# Altium PCB MCU_for_fabrication.PcbDoc
Units mm, origin at the board's own origin, x right, y up, seen from the top; angles counter-clockwise.
Board outline 54.25 x 54.25 mm, 2 copper layers (Top Layer, Bottom Layer); 72 components, 0 nets, 237 pads, 75 vias.
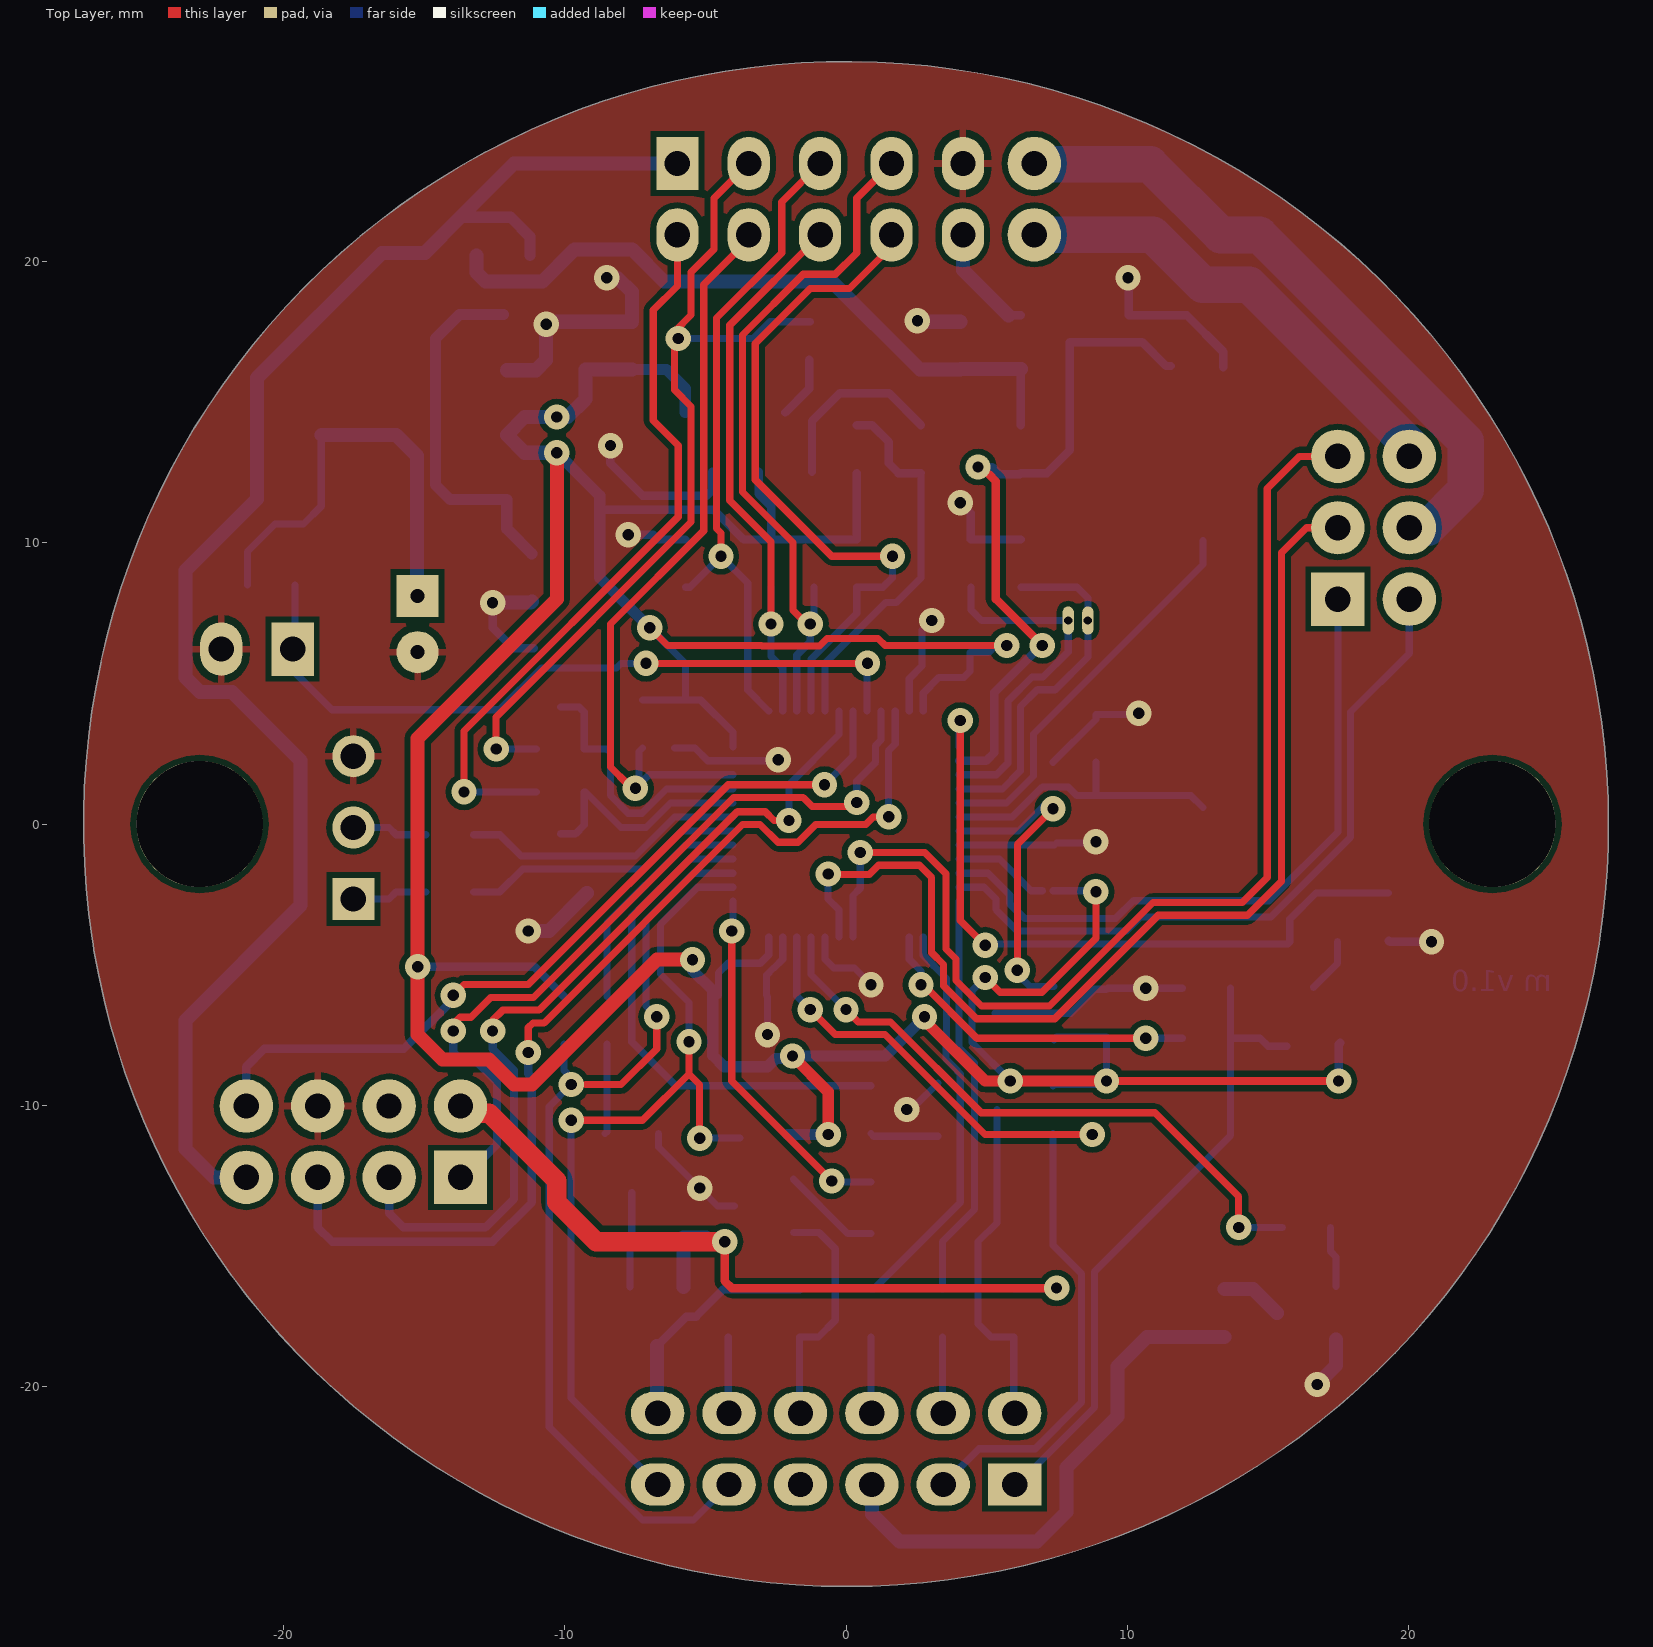
[diagram p0: Top Layer view]
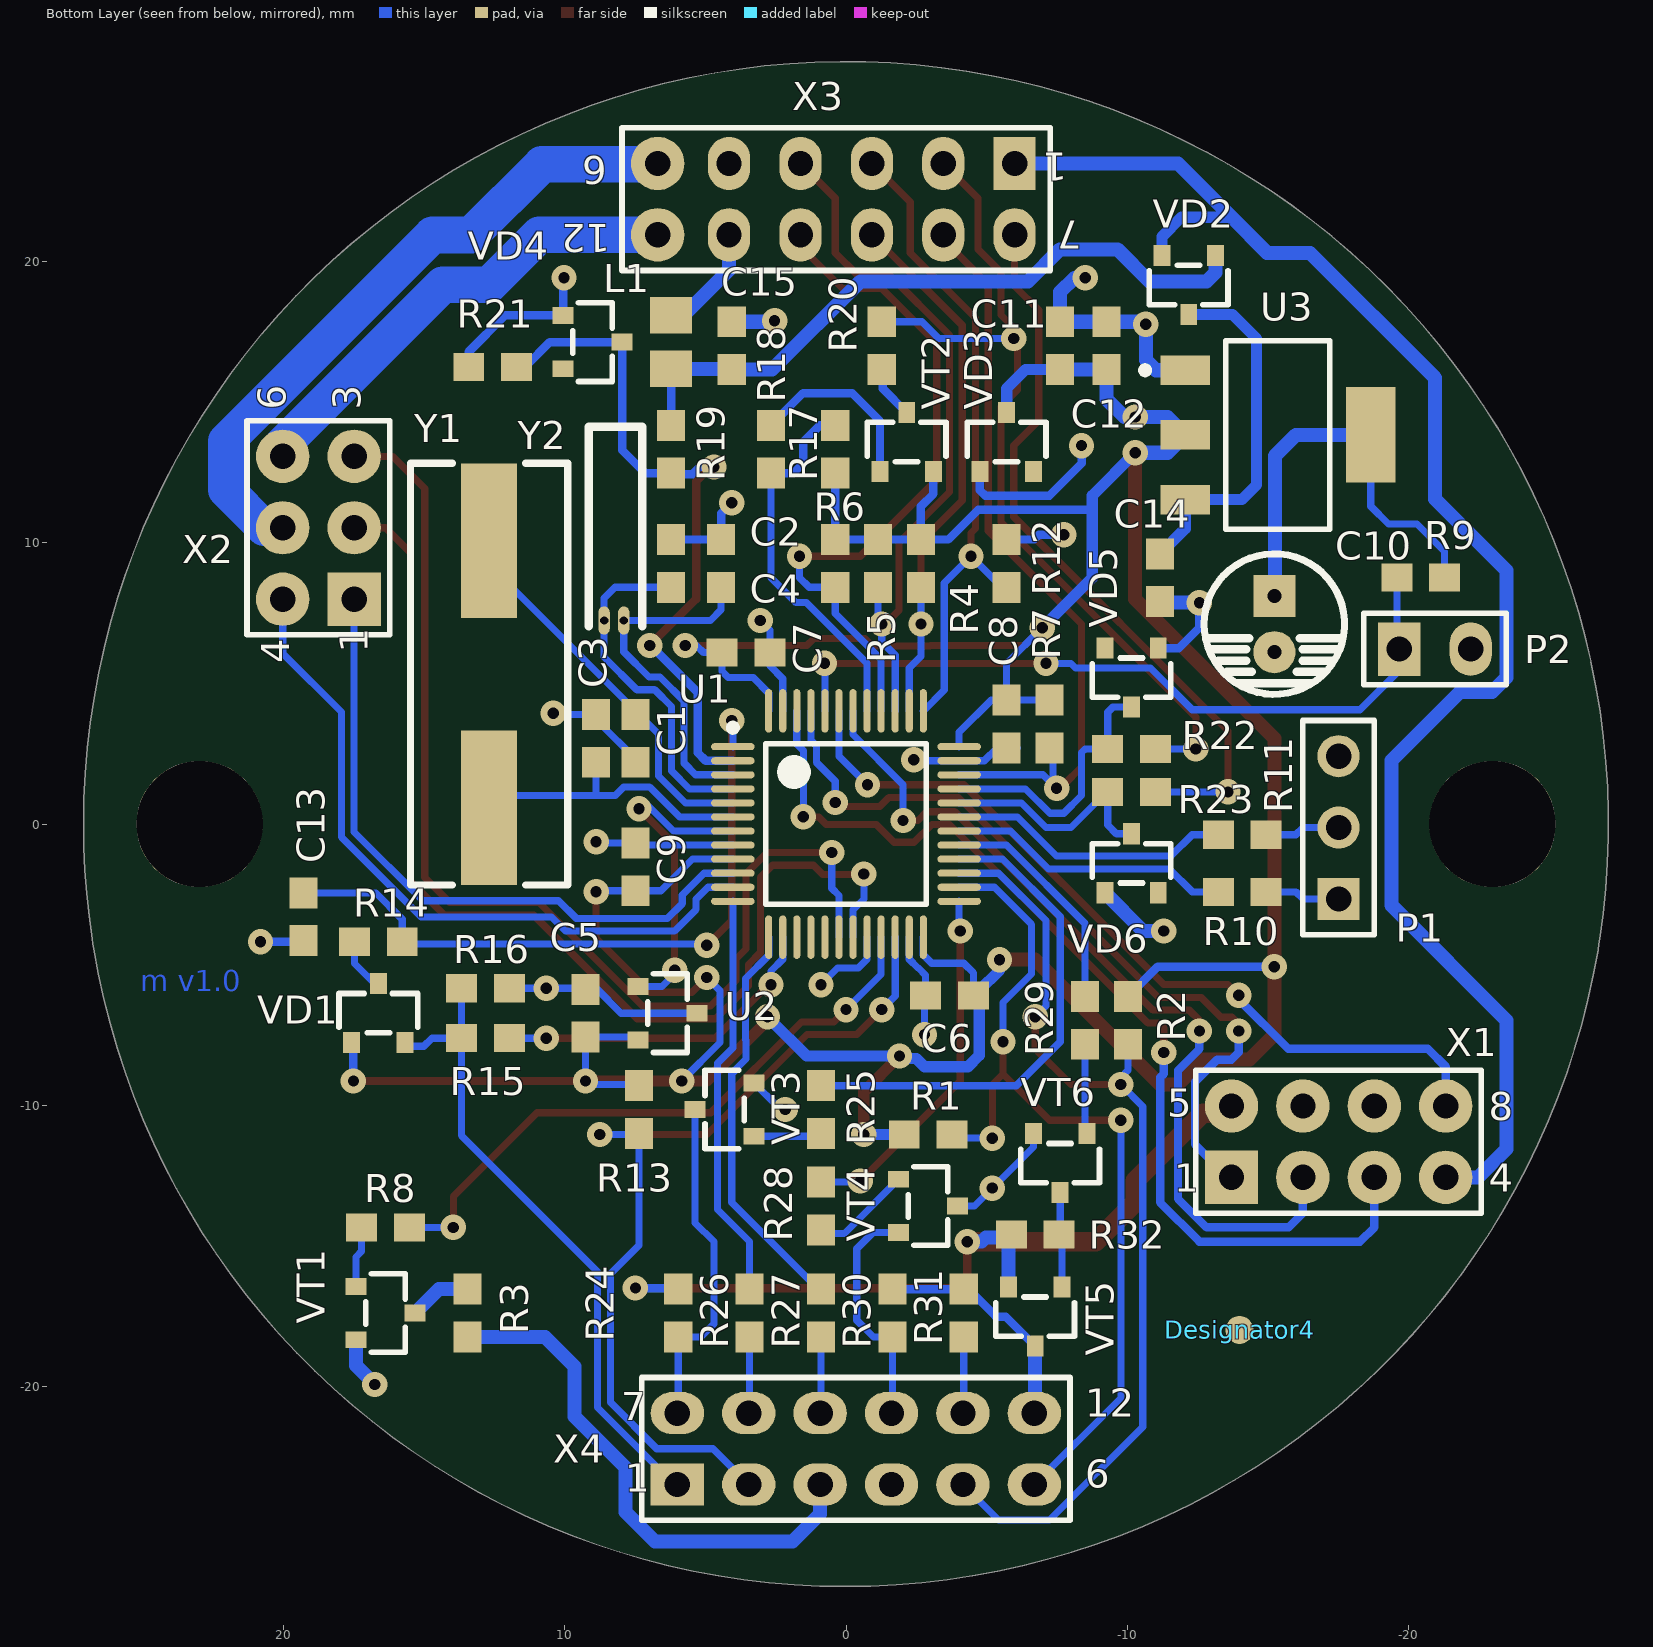
[diagram p1: Bottom Layer view, seen from below]

## Layer stack, top to bottom
Top Solder: solder mask 0.0102, Solder Resist, Dk 3.5
Top Layer: signal copper 0.0356
Dielectric 1: dielectric 0.32, FR-4, Dk 4.8
Bottom Layer: signal copper 0.0356
Bottom Solder: solder mask 0.0102, Solder Resist, Dk 3.5

## Board outline
-26.755,-4.48 cw(c0,0) -26.818,-4.086 cw(c0,0) 27.127,0 cw(c0,0) 26.818,-4.086 cw(c0,0) 26.762,-4.439 cw(c0,0)

## Design rules (kind name [scope] priority, off if disabled: settings)
Clearance [All] p1: gap=0.254
PolygonConnect [All] p1: connectstyle=Relief reliefconductorwidth=0.254 reliefentries=4 polygonreliefangle="90 Angle" airgapwidth=0.254
RoutingVias [All] p1: holewidth=0.711 width=1.27 viastyle="Through Hole" minholewidth=0.711 minwidth=1.27 maxholewidth=0.711 maxwidth=1.27
SolderMaskExpansion [All] p1: expansion=0.102
Width [All] p1: maxlimit=0.254 minlimit=0.254 preferedwidth=0.254
29 further rules are at their usual default settings.

## Components (designator, comment, footprint, x,y, rotation, side; value= is the part's Value field where it differs from the comment)
C1 "15p" 0603C 7.493,3.048 r90 bottom
C2 "15p" 0603C 4.445,9.271 r270 bottom
C3 "15p" 0603C 8.89,3.048 r270 bottom
C4 "15p" 0603C 6.223,9.271 r270 bottom
C5 "100n" 0603C 9.271,-6.731 r270 bottom
C6 "100n" 0603C -3.683,-6.096 r180 bottom
C7 "100n" 0603C 3.556,6.096 r0 bottom
C8 "100n" 0603C -5.715,3.556 r90 bottom
C9 "100n" 0603C 7.493,-1.524 r270 bottom
C10 "Cap Pol1" "CAP 5X...Х2" -15.24,7.112 r270 bottom
C11 "Cap" 0603C -7.62,17.018 r270 bottom
C12 "Cap" 0603C -9.271,17.018 r270 bottom
C13 "0.1u" 0603C 19.304,-3.302 r270 bottom
C14 "Cap" 0603C -11.176,8.763 r90 bottom
C15 "1000p" 0603C 4.064,17.018 r270 bottom
Designator4 "Comment" MRK_ROUND -14.351,-18.288 r90 bottom
L1 "BLM21PG600SN1D" 0805 6.223,17.145 r90 bottom
P1 "BOOT_UART" HDR1X3 -17.526,-2.667 r90 bottom
P2 "BOOT JUMPER" HDR1X2 -19.685,6.223 r180 bottom
R1 "10K" 0603R -2.921,-11.049 r0 bottom
R2 "10K" 0603R -10.033,-6.985 r90 bottom
R3 "470" 0603R 13.462,-17.399 r270 bottom
R4 "10K" 0603R -2.667,9.271 r90 bottom
R5 "10K" 0603R -1.143,9.271 r90 bottom
R6 "10K" 0603R 0.381,9.271 r90 bottom
R7 "10K" 0603R -7.239,3.556 r90 bottom
R8 "100" 0603R 16.383,-14.351 r180 bottom
R9 "1K" 0603R -20.447,8.763 r180 bottom
R10 "270" 0603R -14.097,-2.413 r0 bottom
R11 "270" 0603R -14.097,-0.381 r0 bottom
R12 "10K" 0603R -5.715,9.271 r270 bottom
R13 "10K" 0603R 7.366,-10.16 r270 bottom
R14 "1K" 0603R 16.637,-4.191 r180 bottom
R15 "10K" 0603R 12.827,-7.62 r0 bottom
R16 "100K" 0603R 12.827,-5.842 r0 bottom
R17 "10K" 0603R 0.381,13.335 r270 bottom
R18 "3K" 0603R 2.667,13.335 r90 bottom
R19 "10K" 0603R 6.223,13.335 r90 bottom
R20 "1.5K" 0603R -1.27,17.018 r270 bottom
R21 "100K" 0603R 12.573,16.256 r180 bottom
R22 "33" 0603R -10.16,2.667 r0 bottom
R23 "33" 0603R -10.16,1.143 r0 bottom
R24 "1K" 0603R 5.969,-17.399 r90 bottom
R25 "100" 0603R 0.889,-10.16 r90 bottom
R26 "100" 0603R 3.429,-17.399 r90 bottom
R27 "100" 0603R 0.889,-17.399 r90 bottom
R28 "100" 0603R 0.889,-13.589 r90 bottom
R29 "100" 0603R -8.509,-6.985 r90 bottom
R30 "1K" 0603R -1.651,-17.399 r270 bottom
R31 "10K" 0603R -4.191,-17.399 r270 bottom
R32 "1M" 0603R -6.731,-14.605 r180 bottom
U1 "STM32F103C8T6" LQFP48_L 0,0 r180 bottom
U2 "MCP100" SOT95P230X110-3L 6.35,-6.731 r180 bottom
U3 "LD1117AS12TR" SOT223 -15.367,13.843 r270 bottom
VD1 "BAT54C" SOT95P230X110-3L 16.637,-6.731 r90 bottom
VD2 "BAT54C" SOT95P230X110-3L -12.192,19.177 r270 bottom
VD3 "3.3V" SOT23_1DIODE -5.715,13.589 r90 bottom
VD4 "3.6V" SOT23_1DIODE 9.017,17.145 r180 bottom
VD5 "3.6V" SOT23_1DIODE -10.16,5.207 r270 bottom
VD6 "3.6V" SOT23_1DIODE -10.16,-1.397 r90 bottom
VT1 "BC847" SOT95P230X110-3L 16.383,-17.399 r180 bottom
VT2 "BC807" SOT95P230X110-3L -2.159,13.589 r90 bottom
VT3 "BC847" SOT95P230X110-3L 4.318,-10.16 r0 bottom
VT4 "BC807" SOT95P230X110-3L -2.921,-13.589 r180 bottom
VT5 "MOSFET_P" SOT95P230X110-3L -6.731,-17.526 r270 bottom
VT6 "BC847" SOT95P230X110-3L -7.62,-12.065 r270 bottom
X1 "CON8" HDR2X4_CEN -13.716,-12.573 r180 bottom
X2 "CON6" HDR2X3_CEN 17.5,8 r90 bottom (schematic designator X4)
X3 "CON12" HDR2X6_CEN#1 -6,23.5 r0 bottom
X4 "CON12" HDR2X6_CEN#2 6,-23.5 r180 bottom
Y1 "8 MHz" HC49(CRYSTAL) 12.7,5.334 r270 bottom
Y2 "32768 Hz" "XTAL 32kHz -1" 8.255,7.239 r180 bottom

## Footprints (in the part's own frame and the unit in brackets; to place one, negate y for a bottom-side part, rotate by r counter-clockwise, add the part's x,y. Pads: shape width x height; smd on the part's side, far side on the other; paste and mask are expansions set on the pad)
0603C [mm]
  rect 1.1x1 smd: 1(-0.85,0) 2(0.85,0)
  body extent -0.8,-0.4 0.8,0.4, height 0.8
0603R [mm]
  rect 1.1x1 smd: 1(-0.85,0) 2(0.85,0)
  body extent -0.8,-0.41 0.8,0.41, height 0.45
0805 [mm]
  rect 1.3x1.5 smd: 1(-0.95,0) 2(0.95,0)
  body extent -1,-0.6 1,0.6, height 0.95
"CAP 5X...Х2" [mm] "конденсатор электролитический D=5 и межвыв.=2"
  rect 1.5x1.5 hole 0.5: 1(-1,0)
  round 1.5 hole 0.5: 2(1,0)
  silkscreen extent -2.5,-2.5 2.5,2.5, body extent -2.5,-2.5 2.5,2.5, height 11
HC49(CRYSTAL) [mm]
  rect 5.5x2 smd: 1(-4.75,0) 2(4.75,0)
  silkscreen extent -7.5,-2.8 7.5,2.8, body extent -6.7,-2.45 6.7,2.45, height 5.08
HDR1X2 [mm] "Connector; Header; 2 Position"
  rect 1.5x1.9 hole 0.9: 1(0,0)
  oval 1.5x1.9 hole 0.9: 2(2.54,0)
  silkscreen extent -1.27,-1.27 3.81,1.27
HDR1X3 [mm] "Connector; Header; 3 Position"
  rect 1.5x1.5 hole 0.9: 1(0,0)
  round 1.5 hole 0.9: 2(2.54,0) 3(5.08,0)
  silkscreen extent -1.27,-1.27 6.35,1.27
HDR2X3_CEN [mm] "Connector; Header; 3x2 Position"
  rect 1.9x1.9 hole 0.9: 1(0,0)
  round 1.9 hole 0.9: 2(2.54,0) 3(5.08,0) 4(0,2.54) 5(2.54,2.54) 6(5.08,2.54)
  silkscreen extent -1.27,-1.27 6.35,3.81
HDR2X4_CEN [mm] "Connector; Header; 4x2 Position"
  rect 1.9x1.9 hole 0.9: 1(0,0)
  round 1.9 hole 0.9: 2(2.54,0) 3(5.08,0) 4(7.62,0) 5(0,2.54) 6(2.54,2.54) 7(5.08,2.54) 8(7.62,2.54)
  silkscreen extent -1.27,-1.27 8.89,3.81
HDR2X6_CEN#1 [mm] "Connector; Header; 6x2 Position"
  rect 1.5x1.9 hole 0.9: 1(0,0)
  oval 1.5x1.9 hole 0.9: 2(2.54,0) 3(5.08,0) 4(7.62,0) 5(10.16,0) 7(0,2.54) 8(2.54,2.54) 9(5.08,2.54) 10(7.62,2.54) 11(10.16,2.54)
  round 1.9 hole 0.9: 6(12.7,0) 12(12.7,2.54)
  silkscreen extent -1.27,-1.27 13.97,3.81
HDR2X6_CEN#2 [mm] "Connector; Header; 6x2 Position"
  rect 1.9x1.5 hole 0.9: 1(0,0)
  oval 1.9x1.5 hole 0.9: 2(2.54,0) 3(5.08,0) 4(7.62,0) 5(10.16,0) 6(12.7,0) 7(0,2.54) 8(2.54,2.54) 9(5.08,2.54) 10(7.62,2.54) 11(10.16,2.54) 12(12.7,2.54)
  silkscreen extent -1.27,-1.27 13.97,3.81
LQFP48_L [mm] "Thin QFP, 48-Leads, Body 7x7mm, Pitch 0.5mm, IPC High Density"
  oval 1.55x0.25 smd: 1(-4.025,2.75) 2(-4.025,2.25) 3(-4.025,1.75) 4(-4.025,1.25) 5(-4.025,0.75) 6(-4.025,0.25) 7(-4.025,-0.25) 8(-4.025,-0.75) 9(-4.025,-1.25) 10(-4.025,-1.75) 11(-4.025,-2.25) 12(-4.025,-2.75) 25(4.025,-2.75) 26(4.025,-2.25) 27(4.025,-1.75) 28(4.025,-1.25) 29(4.025,-0.75) 30(4.025,-0.25) 31(4.025,0.25) 32(4.025,0.75) 33(4.025,1.25) 34(4.025,1.75) 35(4.025,2.25) 36(4.025,2.75)
  oval 0.25x1.55 smd: 13(-2.75,-4.025) 14(-2.25,-4.025) 15(-1.75,-4.025) 16(-1.25,-4.025) 17(-0.75,-4.025) 18(-0.25,-4.025) 19(0.25,-4.025) 20(0.75,-4.025) 21(1.25,-4.025) 22(1.75,-4.025) 23(2.25,-4.025) 24(2.75,-4.025) 37(2.75,4.025) 38(2.25,4.025) 39(1.75,4.025) 40(1.25,4.025) 41(0.75,4.025) 42(0.25,4.025) 43(-0.25,4.025) 44(-0.75,4.025) 45(-1.25,4.025) 46(-1.75,4.025) 47(-2.25,4.025) 48(-2.75,4.025)
  silkscreen extent -4.15,-2.85 2.85,3.55, body extent -4.57,-4.57 4.57,4.57, height 1.42
MRK_ROUND [mm]
  round 1 smd paste-2 mask+1: 0(0.288,0.351)
SOT23_1DIODE [mm] "SOT23, 3-Leads, Body 3.0x1.4mm (max), Pitch 0.95mm, IPC High Density 3DModel=\"SOT23\""
  rect 0.75x0.6 smd: A(-1.05,0.95) K(1.05,0) ""(-1.05,-0.95)
  silkscreen extent -0.7,-1.4 0.7,1.4, body extent -1.25,-1.5 1.25,1.5, height 1.1
SOT95P230X110-3L [mm] "SOT23, 3-Leads, Body 3.0x1.4mm (max), Pitch 0.95mm, IPC High Density 3DModel=\"SOT23\""
  rect 0.75x0.6 smd: 1(-1.05,0.95) 2(-1.05,-0.95) 3(1.05,0)
  silkscreen extent -0.7,-1.4 0.7,1.4, body extent -1.25,-1.5 1.25,1.5, height 1.1
SOT223 [mm]
  rect 1.05x1.75 smd: 1(-2.3,-3.3) 2(0,-3.3) 3(2.3,-3.3)
  rect 3.4x1.75 smd: 4(0,3.3)
  silkscreen extent -3.35,-4.85 3.35,1.85, body extent -3.32,-3.55 3.38,3.66, height 1.82
"XTAL 32kHz -1" [mm] "кварцевый резонатор D=2 и межвыв.=0.7"
  oval 0.4x1 hole 0.3: 1(-0.35,0) 2(0.35,0)
  silkscreen extent -0.9,-0.2 1,6.9, body extent -1,-0.14 1,7, height 4.02

## Part data
C1 C2 C3 C4 C5 C6 C7 C8 C9 C13 C15: library part CAP, "Конденсатор обыкновенный"
C10: "Polarized Capacitor (Radial)"
C11 C12 C14: "Capacitor"
L1: library part INDUCTOR_, "Индуктивность с сердечником"
P1: library part "Header 3", "Header, 3-Pin"
P2: library part "Header 2", "Header, 2-Pin"
R1 R2 R3 R4 R5 R6 R7 R8 R9 R10 R11 R12 R13 R14 R15 R16 R17 R18 R19 R20 R21 R22 R23 R24 R25 R26 R27 R28 R29 R30 R31 R32: library part RES, "Резистор обыкновенный"
U1: "STM32 ARM-based 32-bit MCU Performance Line with 64 kB Flash, 20 kB Internal RAM, -40 to +85°C Temperature, 48-Pin LQFP, Tray"
U2: library part RESET_CIRCUIT, "RESET CIRCUIT"
U3: "1A, Low Drop Positive Voltage Regulator, 1.2V, 4-Pin SOT-223, Tape and Reel"
VD1 VD2: library part DIODE_PAIR_C
VD3: library part ZENNER, "Стабилитрон 30в"
VD4 VD5 VD6: library part ZENNER, "Стабилитрон"
VT1 VT3 VT6: library part NPN
VT2: library part SOT32_PNP
VT4: library part PNP
Y1 Y2: library part XTAL, "Crystal Oscillator"

## Free pads (board coordinates)
  round 4.5 hole 4.5: 0(23,0) 1(-23,0)

## Via types
v1: diameter 0.9, hole 0.4, Top Layer to Bottom Layer, 74 vias
v2: diameter 0.9, hole 0.4, Top Layer to Bottom Layer, tented bottom, 1 vias

## Nets (pads, with @x,y where several pads share a name; then routed paths per layer and width w, separated by ;. In a path a pad name is that pad's centre, name@x,y a point inside that pad or via, vN(x,y) a via of type N, cw(c..) or ccw(c..) an arc to the next point about the centre after c; other vN are vias at no path point)
pads on no net: C1.1 C1.2 C2.1 C2.2 C3.1 C3.2 C4.1 C4.2 C5.1 C5.2 C6.1 C6.2 C7.1 C7.2 C8.1 C8.2 C9.1 C9.2 C10.1 C10.2 C11.1 C11.2 C12.1 C12.2 C13.1 C13.2 C14.1 C14.2 C15.1 C15.2 Designator4.0 L1.1 L1.2 P1.1 P1.2 P1.3 P2.1 P2.2 R1.1 R1.2 R2.1 R2.2 R3.1 R3.2 R4.1 R4.2 R5.1 R5.2 R6.1 R6.2 R7.1 R7.2 R8.1 R8.2 R9.1 R9.2 R10.1 R10.2 R11.1 R11.2 R12.1 R12.2 R13.1 R13.2 R14.1 R14.2 R15.1 R15.2 R16.1 R16.2 R17.1 R17.2 R18.1 R18.2 R19.1 R19.2 R20.1 R20.2 R21.1 R21.2 R22.1 R22.2 R23.1 R23.2 R24.1 R24.2 R25.1 R25.2 R26.1 R26.2 R27.1 R27.2 R28.1 R28.2 R29.1 R29.2 R30.1 R30.2 R31.1 R31.2 R32.1 R32.2 U1.1 U1.2 U1.3 U1.4 U1.5 U1.6 U1.7 U1.8 U1.9 U1.10 U1.11 U1.12 U1.13 U1.14 U1.15 U1.16 U1.17 U1.18 U1.19 U1.20 U1.21 U1.22 U1.23 U1.24 U1.25 U1.26 U1.27 U1.28 U1.29 U1.30 U1.31 U1.32 U1.33 U1.34 U1.35 U1.36 U1.37 U1.38 U1.39 U1.40 U1.41 U1.42 U1.43 U1.44 U1.45 U1.46 U1.47 U1.48 U2.1 U2.2 U2.3 U3.1 U3.2 U3.3 U3.4 VD1.1 VD1.2 VD1.3 VD2.1 VD2.2 VD2.3 VD3. VD3.A VD3.K VD4. VD4.A VD4.K VD5. VD5.A VD5.K VD6. VD6.A VD6.K VT1.1 VT1.2 VT1.3 VT2.1 VT2.2 VT2.3 VT3.1 VT3.2 VT3.3 VT4.1 VT4.2 VT4.3 VT5.1 VT5.2 VT5.3 VT6.1 VT6.2 VT6.3 X1.1 X1.2 X1.3 X1.4 X1.5 X1.6 X1.7 X1.8 X2.1 X2.2 X2.3 X2.4 X2.5 X2.6 X3.1 X3.2 X3.3 X3.4 X3.5 X3.6 X3.7 X3.8 X3.9 X3.10 X3.11 X3.12 X4.1 X4.2 X4.3 X4.4 X4.5 X4.6 X4.7 X4.8 X4.9 X4.10 X4.11 X4.12 Y1.1 Y1.2 Y2.1 Y2.2
copper on no net: | length 1349.1
  Top Layer w0.254: v1(-13.97,-7.366) -14.224,-7.366 -13.731,-6.873 -13.343,-6.873 -12.639,-6.169 -11.115,-6.169 -4.003,0.943 -1.524,0.943 -1.201,0.62 0.239,0.62 v1(0.381,0.762) ; v1(-13.97,-6.096) -13.589,-5.715 -11.303,-5.715 -4.191,1.397 v1(-0.762,1.397) ; v1(-13.589,1.143) -13.589,3.309 -5.969,10.929 -5.969,13.462 -6.858,14.351 -6.858,18.288 -6,19.146 -6,20.96 ; v1(-12.573,-7.366) -12.573,-6.985 -12.211,-6.623 -10.927,-6.623 -3.866,0.437 -2.869,0.437 -2.559,0.127 v1(-2.032,0.127) ; v1(-12.446,2.667) -12.446,3.81 -5.515,10.741 -5.515,14.859 -6.096,15.44 -6.096,17.526 -5.515,18.107 -5.515,19.631 -4.699,20.447 -4.699,22.261 -3.46,23.5 ; v1(-11.303,-8.128) -11.303,-7.239 -11.141,-7.077 -10.739,-7.077 -3.678,-0.017 -3.057,-0.017 -2.424,-0.65 -1.71,-0.65 -1.075,-0.015 0.703,-0.015 0.972,0.254 v1(1.524,0.254) ; v1(-9.779,-10.541) -7.239,-10.541 -5.588,-8.89 ; -9.271,-9.271 -8.001,-9.271 -6.731,-8.001 v1(-6.731,-6.858) ; v1@-7.366,1.397 -7.747,1.397 -8.378,2.028 -8.378,7.116 -5.061,10.433 -5.061,19.196 -3.46,20.797 -3.46,20.96 ; v1(-7.112,5.715) v1(0.762,5.715) ; v1(-6.985,6.985) -6.35,6.35 -3.004,6.35 -2.989,6.335 -0.948,6.335 -0.679,6.604 1.143,6.604 1.397,6.35 v1(5.715,6.35) ; v1(-5.588,-7.747) -5.588,-8.89 ; v1(-5.207,-11.176) -5.207,-9.271 -5.588,-8.89 ; v1(-4.445,9.525) -4.445,10.348 -4.607,10.51 -4.607,17.999 -2.286,20.32 -2.286,22.134 -0.92,23.5 ; v1(-4.064,-3.81) -4.064,-9.144 v1(-0.508,-12.7) ; v1(-2.667,7.112) -2.667,10.04 -4.137,11.51 -4.137,17.743 -0.92,20.96 ; v1(-1.27,-6.604) -0.381,-7.493 1.39,-7.493 4.946,-11.049 v1(8.763,-11.049) ; v1(-1.27,7.112) -1.397,7.112 -1.89,7.605 -1.89,10.018 -3.683,11.811 -3.683,17.399 -1.524,19.558 -0.381,19.558 0.381,20.32 0.381,22.261 1.62,23.5 ; v1(-0.635,-1.778) -0.62,-1.793 0.83,-1.793 1.153,-1.47 2.613,-1.47 3.048,-1.905 3.048,-4.579 3.464,-4.995 3.464,-5.757 4.638,-6.931 7.427,-6.931 11.11,-3.248 14.285,-3.248 15.494,-2.039 15.494,9.652 16.382,10.54 17.5,10.54 ; v1(0,-6.604) 0.435,-7.039 1.578,-7.039 4.811,-10.272 10.99,-10.272 13.97,-13.252 v1(13.97,-14.351) ; v1(0.508,-1.016) 2.801,-1.016 3.556,-1.771 3.556,-4.445 3.918,-4.807 3.918,-5.569 4.826,-6.477 7.239,-6.477 10.922,-2.794 14.097,-2.794 14.986,-1.905 14.986,11.938 16.129,13.081 17.499,13.081 17.5,13.08 ; 1.62,20.96 1.62,20.543 0.127,19.05 -1.27,19.05 -3.229,17.091 -3.229,12.246 -0.508,9.525 v1(1.651,9.525) ; v1(2.667,-5.715) 2.75,-5.715 4.655,-7.62 v1(10.668,-7.62) ; v1(4.064,3.683) 4.064,-3.429 v1(4.953,-4.318) ; v1(4.953,-5.461) 5.476,-5.984 6.97,-5.984 8.89,-4.064 v1(8.89,-2.413) ; v1(6.096,-5.207) 6.096,-0.726 v1(7.366,0.544)
  Top Layer w0.3: v2(-4.318,-14.859) -4.318,-16.256 -4.064,-16.51 v1(7.493,-16.51) ; 5.08,12.446 5.334,12.192 5.334,8.001 v1(6.985,6.35) ; v1(9.271,-9.144) v1(17.526,-9.144)
  Top Layer w0.4: v1(-1.905,-8.255) -0.635,-9.525 v1(-0.635,-11.049) ; v1@-0.699,-11.112 v1@-0.635,-11.176 ; v1(2.794,-6.858) 2.794,-6.985 4.953,-9.144 v1(5.842,-9.144) v1(9.271,-9.144)
  Top Layer w0.5: v1(-10.287,13.208) -10.287,8.001 -15.24,3.048 -15.24,-7.493 -14.351,-8.382 -12.7,-8.382 -11.811,-9.271 -11.173,-9.271 -10.403,-8.501 -10.403,-8.498 -6.731,-4.826 v1(-5.461,-4.826)
  Top Layer w0.7: -13.716,-10.033 -13.462,-10.287 -12.7,-10.287 -10.287,-12.7 -10.287,-13.462 -8.89,-14.859 v2(-4.318,-14.859)
  Bottom Layer w0.254: -21.297,8.509 -21.297,9.691 -20.32,10.668 -19.304,10.668 -18.667,11.305 -18.667,13.843 ; -19.597,8.509 -19.597,6.008 -19.558,5.969 -19.558,5.334 -18.288,4.064 -12.319,4.064 -10.828,5.555 -8.161,5.555 -8.001,5.715 v1(-7.112,5.715) ; -17.526,-2.667 -16.256,-2.667 -16.002,-2.413 -14.947,-2.413 ; -17.526,-0.127 -16.256,-0.127 -16.002,-0.381 -14.947,-0.381 ; v1(-13.589,1.143) -11.01,1.143 ; -13.247,-2.413 -12.319,-2.413 -11.503,-1.597 -7.199,-1.597 -5.852,-0.25 -4.025,-0.25 ; -13.247,-0.381 -12.319,-0.381 -11.557,-1.143 -7.493,-1.143 -6.1,0.25 -4.025,0.25 ; v1(-12.446,2.667) -11.01,2.667 ; -10.16,-0.347 -9.618,-0.347 -9.31,-0.039 -9.31,1.143 -9.271,1.143 -8.001,-0.127 -7.119,-0.127 -6.242,0.75 -4.025,0.75 ; -10.16,4.157 -9.491,4.157 -9.31,3.976 -9.31,2.667 -8.509,2.667 -8.382,2.54 -8.382,1.016 -7.747,0.381 -7.253,0.381 -6.384,1.25 -4.025,1.25 ; -10.033,-7.835 -10.033,-8.763 -9.779,-9.017 v1(-9.779,-9.271) -10.556,-10.048 -10.556,-21.448 -7.239,-24.765 -5.425,-24.765 -4.16,-23.5 ; v1(-9.779,-10.541) -9.779,-20.421 -6.7,-23.5 ; -8.57,-11.015 -8.509,-10.954 -8.509,-7.835 ; -8.509,-6.135 -8.509,-3.549 -5.71,-0.75 -4.025,-0.75 ; -7.681,-16.476 -7.681,-14.705 -7.62,-14.644 -7.62,-13.115 ; -7.239,2.706 -7.366,2.579 -7.366,1.397 -7.013,1.75 -4.025,1.75 ; -7.239,4.406 -5.715,4.406 ; v1(-6.985,6.985) -5.715,5.715 -5.715,4.406 ; v1(-6.731,-6.858) -7.112,-6.477 -7.112,-3.436 -5.426,-1.75 -4.025,-1.75 ; -6.67,-11.015 -6.67,-11.491 v1(-5.207,-12.954) -4.572,-13.589 -3.971,-13.589 ; -6.096,2.706 -5.373,2.706 -4.917,2.25 -4.025,2.25 -2.449,2.25 v1(-2.413,2.286) ; v1(-5.969,17.272) -3.302,17.272 -2.706,17.868 -1.27,17.868 ; -5.715,8.421 -5.549,8.421 v1(-4.445,9.525) -3.494,8.574 -3.494,4.764 -2.755,4.025 -2.75,4.025 ; v1(-5.588,-7.747) -5.588,-6.35 -6.604,-5.334 -6.604,-3.57 -5.284,-2.25 -4.025,-2.25 ; v1(-5.207,-11.176) -3.771,-11.176 ; -4.533,-6.096 -4.533,-5.295 -4.191,-4.953 -3.048,-4.953 -2.75,-4.655 -2.75,-4.025 ; -4.191,-18.249 -4.191,-20.929 -4.16,-20.96 ; -4.025,-2.75 -4.025,-3.722 v1@-3.937,-3.81 ; -4.025,-1.25 -5.568,-1.25 -7.62,-3.302 -7.62,-7.747 -6.057,-9.31 0.889,-9.31 ; -4.025,2.75 -4.025,3.263 -5.168,4.406 -5.715,4.406 ; -3.46,23.464 -3.46,23.5 ; -2.833,-6.096 -2.833,-5.38 -2.58,-5.127 -2.563,-5.127 -2.25,-4.814 -2.25,-4.025 ; v1(-2.794,-7.493) -2.794,-6.135 ; -2.667,8.421 v1(-2.667,7.112) -2.667,5.969 -2.25,5.552 -2.25,4.025 ; v1(-2.032,0.127) -2.032,1.397 -0.25,3.179 -0.25,4.025 ; -1.871,-14.539 -0.955,-14.539 -0.381,-15.113 -0.381,-17.653 -0.977,-18.249 -1.651,-18.249 -1.651,-20.929 -1.62,-20.96 ; -1.871,-12.639 0.056,-14.566 0.889,-14.566 ; -1.75,-4.025 -1.75,-6.124 v1(-1.27,-6.604) ; -1.75,4.025 -1.75,6.004 -1.27,6.484 v1(-1.27,7.112) ; -1.25,-4.025 -1.25,-5.354 v1(0,-6.604) ; -1.25,4.025 -1.25,5.862 0.381,7.493 0.381,8.421 1.309,8.421 1.651,8.763 v1(1.651,9.525) ; v1@-1.143,7.366 -1.143,8.421 ; v1(-0.762,1.397) 0.25,2.409 0.25,4.025 ; -0.75,-4.025 -0.75,-4.814 -0.437,-5.127 0.301,-5.127 v1(0.889,-5.715) ; -0.75,4.025 -0.75,5.72 1.404,7.874 1.778,7.874 2.667,8.763 2.667,12.485 ; v1(-0.635,-1.778) -0.635,-2.667 -0.25,-3.052 -0.25,-4.025 ; v1(-0.508,-12.7) -0.469,-12.739 0.889,-12.739 ; 0.25,-4.025 0.25,-2.544 0.508,-2.286 v1(0.508,-1.016) ; v1(0.381,0.762) 0.381,1.524 1.055,2.198 1.055,2.796 1.25,2.991 1.25,4.025 ; 0.75,4.025 0.75,5.703 v1(0.762,5.715) ; 0.889,-18.249 0.889,-20.929 0.92,-20.96 ; 0.889,-16.549 0.977,-16.549 4.064,-13.462 4.064,-8.89 3.97,-8.796 3.97,-8.775 3.556,-8.361 3.556,-7.69 3.571,-7.675 3.571,-5.493 2.75,-4.672 2.75,-4.025 ; 0.889,-11.01 0.989,-11.11 3.268,-11.11 ; v1(1.524,0.254) 1.509,0.269 1.509,2.608 1.75,2.849 1.75,4.025 ; 2.25,-4.025 2.25,-4.814 2.667,-5.231 v1(2.667,-5.715) ; 2.25,4.025 2.25,5.171 2.706,5.627 2.706,6.096 2.706,6.897 v1(3.048,7.239) ; v1@2.413,-10.033 2.445,-10.033 3.268,-9.21 ; 2.75,4.025 2.75,4.655 3.302,5.207 4.191,5.207 4.406,5.422 4.406,6.096 5.061,6.096 5.315,6.35 v1(5.715,6.35) ; 3.429,-18.249 3.429,-20.929 3.46,-20.96 ; 3.429,-16.549 3.429,-14.859 4.572,-13.716 4.572,-8.509 4.025,-7.962 4.025,-5.295 4.025,-2.75 ; 3.46,-23.5 4.735,-22.225 6.731,-22.225 8.382,-20.574 8.382,-16.002 7.366,-14.986 7.366,-11.01 7.405,-11.049 v1(8.763,-11.049) ; v1@3.937,3.683 4.025,3.595 4.025,2.75 ; 4.025,-2.25 4.91,-2.25 5.334,-2.674 5.334,-3.048 6.096,-3.81 9.979,-3.81 10.48,-3.309 15.113,-3.309 17.954,-0.468 17.954,3.984 20.04,6.07 20.04,8 ; 4.025,-1.75 5.052,-1.75 5.828,-2.526 5.828,-2.834 6.35,-3.356 9.598,-3.356 10.223,-2.73 15.05,-2.73 17.5,-0.28 17.5,8 ; 4.025,-1.25 5.461,-1.25 6.585,-2.374 6.985,-2.374 ; 4.025,-0.75 7.417,-0.75 7.493,-0.674 8.851,-0.674 v1(8.89,-0.635) ; 4.025,-0.25 6.136,-0.25 7.148,0.762 v1(7.366,0.544) ; 4.025,0.25 5.914,0.25 6.985,1.321 7.906,1.321 8.211,1.016 8.89,1.016 ; 4.025,0.75 5.71,0.75 6.666,1.706 6.666,3.198 12.7,9.232 12.7,10.084 ; 4.025,1.25 5.568,1.25 6.212,1.894 6.212,4.18 6.807,4.775 7.442,4.775 8.605,5.938 8.605,7.239 8.605,8.032 8.216,8.421 6.223,8.421 ; 4.025,1.75 5.349,1.75 5.758,2.159 5.758,4.368 6.619,5.229 7.007,5.229 7.905,6.127 7.905,7.239 4.826,7.239 4.445,7.62 4.445,8.421 ; v1(4.953,-5.461) 4.479,-5.935 4.479,-7.774 5.842,-9.137 v1(5.842,-9.144) ; v1(4.953,-4.318) 5.007,-4.264 15.714,-4.264 15.787,-4.191 15.787,-3.39 16.725,-2.452 19.304,-2.452 ; 5.3,-6.731 8.001,-6.731 8.851,-5.881 9.271,-5.881 ; 5.368,-10.16 5.368,-14.19 4.699,-14.859 4.699,-17.78 5.168,-18.249 5.969,-18.249 5.969,-20.929 6,-20.96 ; 6,-23.5 6.098,-23.5 8.836,-20.762 8.836,-15.929 13.677,-11.088 13.677,-7.62 ; v1(6.096,-5.207) 6.096,-5.334 6.543,-5.781 7.4,-5.781 ; 7.366,-9.31 7.405,-9.271 v1@9.271,-9.271 ; 7.366,-2.374 7.493,-2.374 8.851,-2.374 v1(8.89,-2.413) ; 7.366,2.198 8.89,3.722 8.89,3.898 10.326,3.898 v1@10.414,3.81 ; 7.4,-7.681 7.5,-7.581 9.271,-7.581 v1(9.271,-9.144) ; 8.89,2.198 8.89,1.016 ; 9.31,-5.842 v1(10.668,-5.842) 11.977,-5.842 ; v1(10.668,-7.62) 11.977,-7.62 ; 12.7,0.584 12.268,1.016 8.89,1.016 ; 13.677,-5.842 13.677,-7.62 ; v1(13.97,-14.351) 15.533,-14.351 ; 15.687,-7.908 15.02,-7.908 14.732,-7.62 13.677,-7.62 ; 16.637,-5.808 17.487,-4.958 17.487,-4.191 ; 17.233,-14.351 17.233,-15.201 17.433,-15.401 17.433,-16.449
  Bottom Layer w0.3: -21.336,-10.033 -21.336,-8.636 -20.701,-8.001 -15.736,-8.001 -13.97,-6.235 v1(-13.97,-6.096) ; -18.796,-12.573 -18.796,-14.351 -18.288,-14.859 -12.573,-14.859 -11.176,-13.462 -11.176,-9.017 -11.303,-8.89 v1(-11.303,-8.128) v1@-11.176,-8.255 ; -16.256,-12.573 -16.256,-13.843 -15.748,-14.351 -12.827,-14.351 -11.811,-13.335 -11.811,-8.763 -12.573,-8.001 v1(-12.573,-7.366) ; v1(-15.24,-5.08) -11.088,-5.08 -10.033,-6.135 ; v1@-14.224,-7.366 v1(-13.97,-7.366) -13.97,-8.128 -13.716,-8.382 -13.208,-8.382 -12.416,-9.174 -12.416,-11.4 -13.589,-12.573 -13.716,-12.573 ; v1(-12.573,7.874) -12.573,6.985 -11.845,6.257 -11.11,6.257 ; -8.763,11.176 -4.699,11.176 -3.644,10.121 -2.667,10.121 ; v1(-8.382,13.462) -8.382,12.827 -7.239,11.684 -4.953,11.684 -4.765,11.872 -4.765,12.539 ; v1(-7.747,10.287) -6.858,10.287 -6.692,10.121 -5.715,10.121 ; -6.731,-18.576 -5.681,-17.526 -5.334,-17.526 -4.357,-16.549 -4.191,-16.549 -1.651,-16.549 ; -3.109,12.539 -3.109,11.745 -2.667,11.303 -2.667,10.121 ; -2.159,14.639 -1.309,15.489 -1.309,16.51 ; -1.209,12.539 -1.209,14.334 -0.215,15.328 1.524,15.328 2.667,14.185 ; 0.381,12.485 0.381,10.121 -1.143,10.121 -2.667,10.121 ; 0.381,14.185 0.928,14.185 1.524,13.589 1.524,12.827 1.866,12.485 2.667,12.485 ; v1(2.54,17.907) v1@2.579,17.868 ; 4.025,2.25 4.991,2.25 5.281,2.54 5.281,4.686 v1@6.965,6.37 ; v1(4.064,11.43) 4.445,11.049 4.445,10.121 6.223,10.121 ; 4.064,16.168 4.091,16.195 ; v1(4.699,12.7) 5.207,12.7 5.461,12.446 6.184,12.446 6.223,12.485 7.151,12.485 7.967,13.301 7.967,17.145 10.541,17.145 11.391,16.295 11.557,16.295 ; 5.781,18.095 6.223,18.095 ; 6.008,-16.51 v1(7.493,-16.51) ; 6.223,14.185 6.223,16.195 ; v1(10.033,19.431) 10.067,19.397 10.067,18.095 12.131,18.095 13.423,16.803 13.423,16.256 ; v1(17.526,-9.144) 17.526,-7.842 17.587,-7.781 ; 19.304,-4.152 19.343,-4.191 v1(20.828,-4.191)
  Bottom Layer w0.4: -13.716,21.59 -11.938,21.59 -11.242,20.894 -11.242,20.227 ; -12.192,18.127 -13.75,18.127 -14.605,17.272 -14.605,12.065 -14.083,11.543 -12.067,11.543 -12.067,10.504 -11.176,9.613 ; v1(-10.287,13.208) -8.763,11.684 -8.763,11.176 -8.763,8.763 v1(-6.985,6.985) ; -7.62,16.168 -6.389,16.168 -5.715,15.494 -5.715,14.639 ; v1(-5.461,-4.826) -5.461,-5.207 -4.738,-5.93 -4.738,-8.236 -4.338,-8.636 -2.794,-8.636 -2.501,-8.343 -1.993,-8.343 v1(-1.905,-8.255) 1.397,-8.255 2.667,-6.985 v1@2.794,-6.985 ; -2.071,-11.049 -0.762,-11.049 v1@-0.635,-11.176
  Bottom Layer w0.5: -21.336,-12.573 -22.479,-12.573 -23.495,-11.557 -23.495,-6.985 -19.401,-2.891 -19.401,2.256 -21.844,4.699 -22.987,4.699 -23.495,5.207 -23.495,9.017 -20.955,11.557 -20.955,15.875 -16.51,20.32 -14.986,20.32 -13.716,21.59 -11.806,23.5 -6,23.5 ; -18.667,13.843 -16.002,13.843 -15.255,13.096 -15.255,8.127 -15.24,8.112 ; -13.142,20.227 -13.142,19.619 -12.827,19.304 -10.795,19.304 -9.652,20.447 -7.62,20.447 -6.477,19.304 -0.508,19.304 2.628,16.168 4.064,16.168 ; v1(-12.573,7.874) -11.215,7.874 -11.176,7.913 ; -12.067,16.143 -11.035,16.143 -10.668,16.51 v1(-10.668,17.78) -10.58,17.868 -9.271,17.868 -7.62,17.868 -7.62,18.923 -8.128,19.431 v1(-8.509,19.431) ; v1(-11.303,-3.81) -10.573,-3.81 -9.21,-2.447 ; v1(-10.287,13.208) -11.432,13.208 -12.067,13.843 -11.432,14.478 v1(-10.287,14.478) -9.906,14.478 -9.271,15.113 -9.271,16.168 -7.62,16.168 ; -6.731,-18.576 -6.731,-20.929 -6.7,-20.96 ; -5.781,-16.476 -5.781,-14.705 -4.98,-14.705 -4.826,-14.859 v2(-4.318,-14.859) ; 0.92,-23.5 0.92,-24.542 1.905,-25.527 6.802,-25.527 7.846,-24.483 7.846,-22.888 9.652,-21.082 9.652,-19.304 10.707,-18.249 13.462,-18.249 ; v1@2.579,17.868 4.064,17.868 ; 4.091,16.195 6.223,16.195 ; 4.16,20.96 4.16,19.716 5.781,18.095 ; 13.462,-16.549 14.483,-16.549 15.333,-17.399 ; v1(16.764,-19.939) 17.433,-19.27 17.433,-18.349
  Bottom Layer w1: 20.04,13.08 20.04,13.488
  Bottom Layer w1.3: 6.7,20.96 10.917,20.96 12.7,19.177 14.351,19.177 20.04,13.488 ; 6.7,23.5 6.732,23.468 10.822,23.468 13.335,20.955 14.711,20.955 22.056,13.61 22.056,11.896 20.7,10.54 20.04,10.54
  other v1: 2.159,-10.16 -7.493,1.27 10.414,3.937

## Polygon pours and split planes (outlines as drawn)
no net on Top Layer "GND_POLY" (solid, pour order 5): 26.755,-4.48 ccw(c0,0) 26.818,-4.086 ccw(c0,0) -27.127,0 ccw(c0,0) -26.818,-4.086 ccw(c0,0) -26.762,-4.439 ccw(c0,0)

## Other copper
Bottom Layer:
  text "m v1.0" at 25.1,-6.2 h1.3

## Silkscreen, mask and mechanical layers (free items; w line width, h text height)
Mechanical 4:
  lines w0.254: -26.692,-4.067 ccw(c0,0) 26.692,-4.067 ; -26.636,-4.418 cw(c0,0) 26.629,-4.459

## Text inside footprints (layer, text, board x,y; h text height)
X1: Bottom Overlay "5" at -11.43,-10.414 h1; Bottom Overlay "1" at -11.684,-13.081 h1; Bottom Overlay "4" at -22.86,-13.081 h1; Bottom Overlay "8" at -22.86,-10.541 h1
X2: Bottom Overlay "6" at 19.939,14.731 h1 r270; Bottom Overlay "3" at 17.272,14.731 h1 r270; Bottom Overlay "1" at 17.018,6.095 h1 r270; Bottom Overlay "4" at 19.812,5.715 h1 r270
X3: Bottom Overlay "12" at 8.382,21.336 h1 r180; Bottom Overlay "6" at 8.509,23.749 h1 r180; Bottom Overlay "1" at -7.874,23.876 h1 r180; Bottom Overlay "7" at -8.382,21.463 h1 r180
X4: Bottom Overlay "12" at -8.509,-21.082 h1; Bottom Overlay "6" at -8.509,-23.622 h1; Bottom Overlay "1" at 7.846,-23.749 h1; Bottom Overlay "7" at 8.001,-21.209 h1